# EAGLE board threshold (EAGLE 7.5.0), part 1 of 2
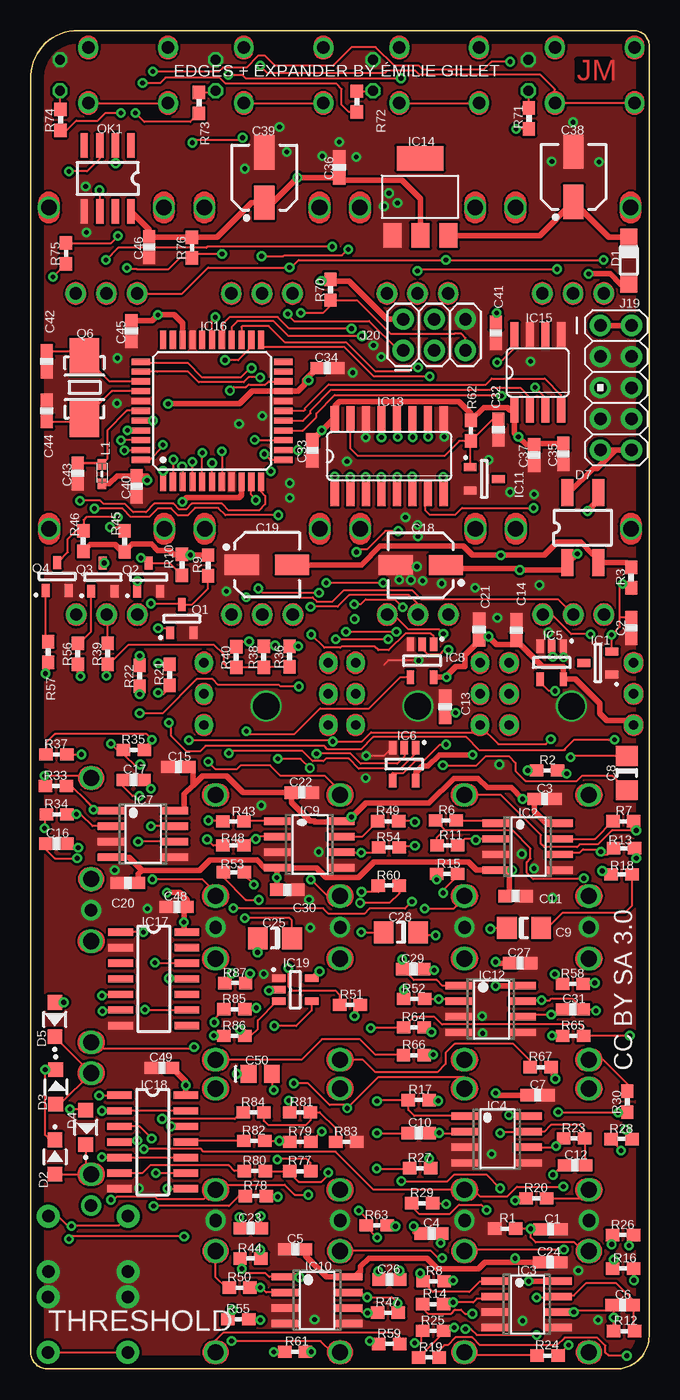
[diagram p0: board, top side]
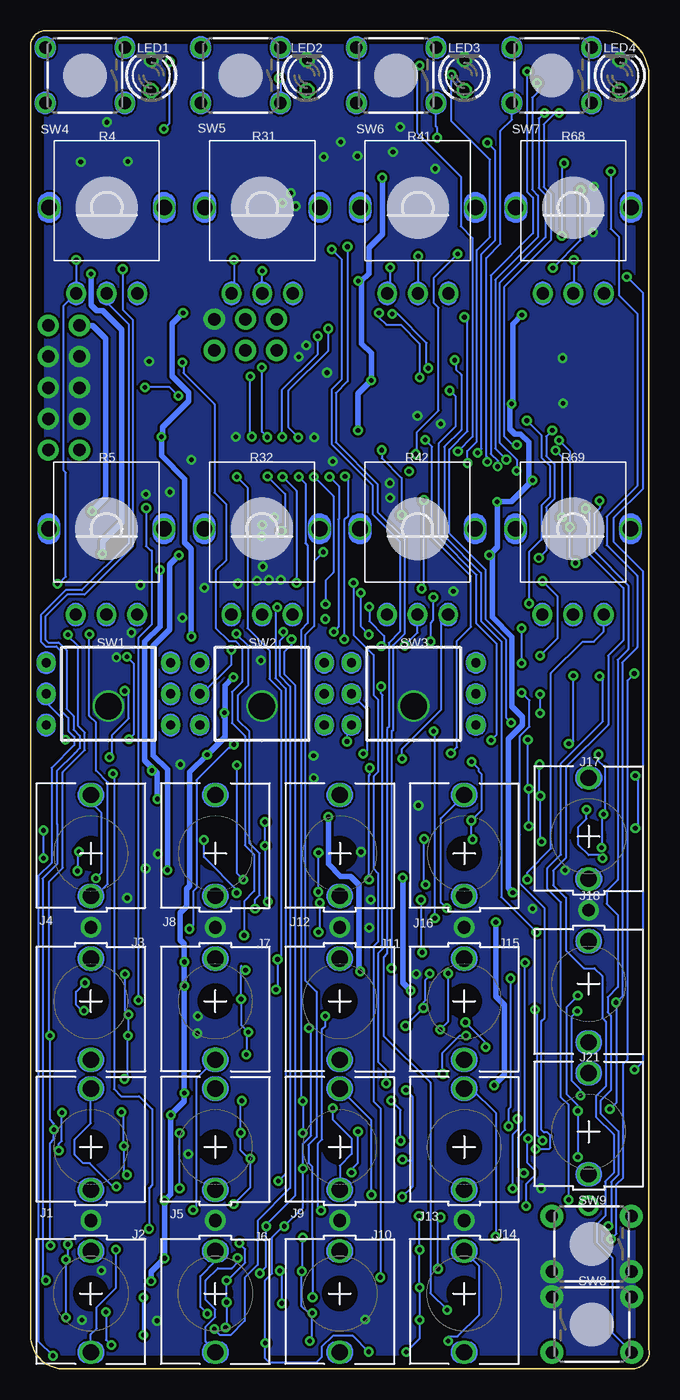
[diagram p1: board, bottom side, seen from below]

Size 50.5 x 109.22 mm. Coordinates in mm from the lower left corner, seen from the top.
Outline: 3.51,109.22 arc82 0.01,105.57 0.01,1.59 arc102 1.45,0 47.96,0 arc86 50.5,2.7 50.5,108.11 arc84 49.23,109.22 3.51,109.22
Copper layers (1*16): Top 0.035mm / dielectric 1.5mm / Bottom 0.035mm
Design rules "default *": minimum track width 10mil, minimum drill 0.61mm, track to track 8mil, track to pad 8mil, pad to pad 8mil, via to via 8mil, smd to smd 8mil, copper to edge 40mil, drill to drill 8mil, minimum pad ring 0mil, minimum via ring 8mil, stop-mask expansion 4mil, vias tented up to drill 24mil, thermal gap 10mil
Net classes: 0 Default: width 0.178 mm, clearance 0.152 mm, clearance 0.152 mm to class 1; 1 power: width 0.432 mm, clearance 0.152 mm, clearance 0.152 mm to class 0

## Footprints (pad centres in the part's own frame; a part is rotated, then mirrored left to right if it is on the bottom)
CAP_0603 = smd 1.1 x 1: 1 -0.85,0; 2 0.85,0
CAP_0603_C2 = smd 1.1 x 1: 1 -0.85,0; 2 0.85,0
CAP_0603_C4 = smd 1.1 x 1: 1 -0.85,0; 2 0.85,0
CAP_1206 = smd 1.6 x 1.8: 1 -1.4,0; 2 1.4,0
CAP_1206_C9 = smd 1.6 x 1.8: 1 -1.4,0; 2 1.4,0
CAP_0603_C11 = smd 1.1 x 1: 1 -0.85,0; 2 0.85,0
CAP_0603_C13 = smd 1.1 x 1: 1 -0.85,0; 2 0.85,0
CAP_0603_C14 = smd 1.1 x 1: 1 -0.85,0; 2 0.85,0
CAP_0603_C17 = smd 1.1 x 1: 1 -0.85,0; 2 0.85,0
CAPAE-5.3x5.3h7 = smd 2.8 x 1.65: 1 -2.05,0; 2 2.05,0
CAPAE-5.3x5.3h7_C19 = smd 2.8 x 1.65: 1 -2.05,0; 2 2.05,0
CAP_0603_C20 = smd 1.1 x 1: 1 -0.85,0; 2 0.85,0
CAP_1206_C28 = smd 1.6 x 1.8: 1 -1.4,0; 2 1.4,0
CAP_0603_C30 = smd 1.1 x 1: 1 -0.85,0; 2 0.85,0
CAP_0603_C32 = smd 1.1 x 1: 1 -0.85,0; 2 0.85,0
CAPAE-5.3x5.3h7_C38 = smd 2.8 x 1.65: 1 -2.05,0; 2 2.05,0
CAP_0603_C41 = smd 1.1 x 1: 1 -0.85,0; 2 0.85,0
CAP_0603_C42 = smd 1.1 x 1: 1 -0.85,0; 2 0.85,0
CAP_0603_C44 = smd 1.1 x 1: 1 -0.85,0; 2 0.85,0
CAP_0603_C46 = smd 1.1 x 1: 1 -0.85,0; 2 0.85,0
CAP_0805 = smd 1.3 x 1.5: 1 -0.95,0; 2 0.95,0
SOD123 = smd 1.4 x 1.4 rotated 0: A 1.9,0; C -1.9,0
SOD-123F = smd 1.2 x 1.2: 1 -1.4,0; 2 1.4,0
SOD-123F_D3 = smd 1.2 x 1.2: 1 -1.4,0; 2 1.4,0
SOD-123F_D4 = smd 1.2 x 1.2: 1 -1.4,0; 2 1.4,0
SOD-123F_D5 = smd 1.2 x 1.2: 1 -1.4,0; 2 1.4,0
SOP-4/6.5x2.54 = smd 2.2 x 1: 1 -2.855,1.27; 2 -2.855,-1.27; 3 2.855,-1.27; 4 2.855,1.27
SOT23 = smd 1.05 x 0.65: 1 -1.15,0.95; 2 -1.15,-0.95; 3 1.15,0
SO08 = smd 0.6 x 2.2 rotated 0: 1 -1.905,-2.6; 2 -0.635,-2.6; 3 0.635,-2.6; 4 1.905,-2.6; 5 1.905,2.6; 6 0.635,2.6; 7 -0.635,2.6; 8 -1.905,2.6
SOT23-5 = smd 1.1 x 0.6: 1 -1.35,0.95; 2 -1.35,0; 3 -1.35,-0.95; 4 1.35,-0.95; 5 1.35,0.95
SOT23-5_IC8 = smd 1.1 x 0.6: 1 -1.35,0.95; 2 -1.35,0; 3 -1.35,-0.95; 4 1.35,-0.95; 5 1.35,0.95
SOT23_IC11 = smd 1.05 x 0.65: 1 -1.15,0.95; 2 -1.15,-0.95; 3 1.15,0
SO16 = smd 0.66 x 2.032 rotated 0: 1 -4.445,-3.073; 2 -3.175,-3.073; 3 -1.905,-3.073; 4 -0.635,-3.073; 5 0.635,-3.073; 6 1.905,-3.073; 7 3.175,-3.073; 8 4.445,-3.073; 9 4.445,3.073; 10 3.175,3.073; 11 1.905,3.073; 12 0.635,3.073; 13 -0.635,3.073; 14 -1.905,3.073; 15 -3.175,3.073; 16 -4.445,3.073
SOT223 = smd 1.499 x 2.007 rotated 0: 1 -2.261,-3.15; 2 0.025,-3.15; 3 2.311,-3.15 | smd 3.81 x 2.007 rotated 0: 4 0,3.15
SO08_IC15 = smd 0.66 x 2.032 rotated 0: 1 -1.905,-3.073; 2 -0.635,-3.073; 3 0.635,-3.073; 4 1.905,-3.073; 5 1.905,3.073; 6 0.635,3.073; 7 -0.635,3.073; 8 -1.905,3.073
TQFP44 = smd 1.5 x 0.5 rotated 0: 1 -5.8,4; 2 -5.8,3.2; 3 -5.8,2.4; 4 -5.8,1.6; 5 -5.8,0.8; 6 -5.8,0; 7 -5.8,-0.8; 8 -5.8,-1.6; 9 -5.8,-2.4; 10 -5.8,-3.2; 11 -5.8,-4; 23 5.8,-4; 24 5.8,-3.2; 25 5.8,-2.4; 26 5.8,-1.6; 27 5.8,-0.8; 28 5.8,0; 29 5.8,0.8; 30 5.8,1.6; 31 5.8,2.4; 32 5.8,3.2; 33 5.8,4 | smd 0.5 x 1.5: 12 -4,-5.8; 13 -3.2,-5.8; 14 -2.4,-5.8; 15 -1.6,-5.8; 16 -0.8,-5.8; 17 0,-5.8; 18 0.8,-5.8; 19 1.6,-5.8; 20 2.4,-5.8; 21 3.2,-5.8; 22 4,-5.8; 34 4,5.8; 35 3.2,5.8; 36 2.4,5.8; 37 1.6,5.8; 38 0.8,5.8; 39 0,5.8; 40 -0.8,5.8; 41 -1.6,5.8; 42 -2.4,5.8; 43 -3.2,5.8; 44 -4,5.8
SOIC-14/150mil = smd 2 x 0.6: 1 -2.7,3.81; 2 -2.7,2.54; 3 -2.7,1.27; 4 -2.7,0; 5 -2.7,-1.27; 6 -2.7,-2.54; 7 -2.7,-3.81; 8 2.7,-3.81; 9 2.7,-2.54; 10 2.7,-1.27; 11 2.7,0; 12 2.7,1.27; 13 2.7,2.54; 14 2.7,3.81
SOT23-5_IC19 = smd 1.1 x 0.6: 1 -1.351,0.95; 2 -1.351,0; 3 -1.351,-0.95; 4 1.349,-0.95; 5 1.349,0.95
Thonkiconn_Jack = drill 1.321 pad 1.905: 1 0,3.48; 2 0,-4.775 | drill 1.016 pad 1.651: 3 0,6.02
Thonkiconn = drill 1.321 pad 1.905: 1 0,3.48; 2 0,-4.775 | drill 1.016 pad 1.651: 3 0,6.02
Thonkiconn_J3 = drill 1.321 pad 1.905: 1 0,3.48; 2 0,-4.775 | drill 1.016 pad 1.651: 3 0,6.02
Thonkiconn_J4 = drill 1.321 pad 1.905: 1 0,3.48; 2 0,-4.775 | drill 1.016 pad 1.651: 3 0,6.02
Thonkiconn_Jack_J5 = drill 1.321 pad 1.905: 1 0,3.48; 2 0,-4.775 | drill 1.016 pad 1.651: 3 0,6.02
Thonkiconn_J10 = drill 1.321 pad 1.905: 1 0,3.48; 2 0,-4.775 | drill 1.016 pad 1.651: 3 0,6.02
Thonkiconn_J17 = drill 1.321 pad 1.905: 1 0,3.48; 2 0,-4.775 | drill 1.016 pad 1.651: 3 0,6.02
Thonkiconn_Jack_J18 = drill 1.321 pad 1.905: 1 0,3.48; 2 0,-4.775 | drill 1.016 pad 1.651: 3 0,6.02
AVR_ICSP = drill 1.016 pad 1.727: 1 -1.27,5.08; 2 1.27,5.08; 3 -1.27,2.54; 4 1.27,2.54; 5 -1.27,0; 6 1.27,0; 7 -1.27,-2.54; 8 1.27,-2.54; 9 -1.27,-5.08; 10 1.27,-5.08
2X3 = drill 1.016 pad 1.727: 1 0,0; 2 0,2.54; 3 2.54,0; 4 2.54,2.54; 5 5.08,0; 6 5.08,2.54
Thonkiconn_Jack_J21 = drill 1.321 pad 1.905: 1 0,3.48; 2 0,-4.775 | drill 1.016 pad 1.651: 3 0,6.02
0603 = smd 0.85 x 0.7 rotated 0: 1 -0.9,0; 2 0.7,0
LED3MM = drill 0.813 pad 1.22 octagon: A -1.27,0; K 1.27,0
SOIC-8/150mil = smd 2 x 0.6: 1 -2.7,1.905; 2 -2.7,0.635; 3 -2.7,-0.635; 4 -2.7,-1.905; 5 2.7,-1.905; 6 2.7,-0.635; 7 2.7,0.635; 8 2.7,1.905
SOT23_Q1 = smd 1.05 x 0.65: 1 -1.15,0.95; 2 -1.15,-0.95; 3 1.15,0
SOT23_Q2 = smd 1.05 x 0.65: 1 -1.15,0.95; 2 -1.15,-0.95; 3 1.15,0
TSC_7A_crystal = smd 3 x 2.4: 1 2.536,0; 2 -2.535,0
RES_0603 = smd 1.1 x 1: 1 -0.85,0; 2 0.85,0
RES_0603_R2 = smd 1.1 x 1: 1 -0.85,0; 2 0.85,0
RES_0603_R3 = smd 1.1 x 1: 1 -0.85,0; 2 0.85,0
ALPS_POT_VERTICAL_PS = drill 1 pad 1.611: P$1 -2.5,7; P$2 0,7; P$3 2.5,7 | drill 1.27 pad 1.778: P$4 -4.7,0; P$5 4.7,0
RES_0603_R7 = smd 1.1 x 1: 1 -0.85,0; 2 0.85,0
RES_0603_R10 = smd 1.1 x 1: 1 -0.85,0; 2 0.85,0
RES_0603_R13 = smd 1.1 x 1: 1 -0.85,0; 2 0.85,0
RES_0603_R43 = smd 1.1 x 1: 1 -0.85,0; 2 0.85,0
RES_0603_R45 = smd 1.1 x 1: 1 -0.85,0; 2 0.85,0
RES_0603_R57 = smd 1.1 x 1: 1 -0.85,0; 2 0.85,0
RES_0603_R62 = smd 1.1 x 1: 1 -0.85,0; 2 0.85,0
RES_0603_R72 = smd 1.1 x 1: 1 -0.85,0; 2 0.85,0
RES_0603_R73 = smd 1.1 x 1: 1 -0.85,0; 2 0.85,0
RES_0603_R75 = smd 1.1 x 1: 1 -0.85,0; 2 0.85,0
RES_0603_R78 = smd 1.1 x 1: 1 -0.85,0; 2 0.85,0
pvb6i = drill 0.762 pad 1.524: 1' -2.54,5.08; 2' 2.54,5.08; 4 -2.54,-5.08; 5C 0,-5.08; 6 2.54,-5.08; C' 0,5.08 | drill 2.159 pad 2.54: 3 0.991,0
pvb6i_SW2 = drill 0.762 pad 1.524: 1' -2.54,5.08; 2' 2.54,5.08; 4 -2.54,-5.08; 5C 0,-5.08; 6 2.54,-5.08; C' 0,5.08 | drill 2.159 pad 2.54: 3 0.991,0
TACTILE-PTH = drill 1.016 pad 1.626: 1 -3.251,2.261; 2 3.251,2.261; 3 -3.251,-2.261; 4 3.251,-2.261
TACTILE-PTH_SW6 = drill 1.016 pad 1.626: 1 -3.251,2.261; 2 3.251,2.261; 3 -3.251,-2.261; 4 3.251,-2.261
TACTILE-PTH_SW8 = drill 1.016 pad 1.88: 1 -3.251,2.261; 2 3.251,2.261; 3 -3.251,-2.261; 4 3.251,-2.261
TACTILE-PTH_SW9 = drill 1.016 pad 1.88: 1 -3.251,2.261; 2 3.251,2.261; 3 -3.251,-2.261; 4 3.251,-2.261

## Placement (x,y rotation side)
C1  470n  [CAP_0603]  42.44,11.39 0 top
C2  470n  [CAP_0603_C2]  49.04,60.47 270 top
C3  100n  [CAP_0603]  41.98,46.51 0 top
C4  100p  [CAP_0603_C4]  32.73,11.05 180 top
C5  100n  [CAP_0603_C4]  21.59,9.76 180 top
C6  100p  [CAP_0603]  48.34,5.21 0 top
C7  100n  [CAP_0603]  41.4,22.34 0 top
C8  10u  [CAP_1206]  48.67,48.63 270 top
C9  10u  [CAP_1206_C9]  40.29,36 0 top
C10  100p  [CAP_0603_C4]  31.69,19.24 180 top
C11  100n  [CAP_0603_C11]  39.61,38.59 180 top
C12  100p  [CAP_0603]  44.44,16.6 0 top
C13  100n  [CAP_0603_C13]  33.85,54.03 90 top
C14  100n  [CAP_0603_C14]  39.65,60.3 90 top
C15  100n  [CAP_0603_C2]  12.07,49.12 180 top
C16  18p  [CAP_0603_C4]  2.1,42.86 180 top
C17  18p  [CAP_0603_C17]  8.41,48.07 0 top
C18  47u  [CAPAE-5.3x5.3h7]  31.86,65.59 180 top
C19  47u  [CAPAE-5.3x5.3h7_C19]  19.29,65.62 0 top
C20  100n  [CAP_0603_C20]  7.94,39.65 0 top
C21  100n  [CAP_0603_C14]  36.62,60.35 90 top
C22  100n  [CAP_0603]  22.14,47.03 0 top
C23  100p  [CAP_0603_C4]  17.98,11.47 180 top
C24  100n  [CAP_0603_C17]  42.4,8.7 0 top
C25  10u  [CAP_1206]  19.94,35.14 180 top
C26  100p  [CAP_0603]  29.3,7.28 0 top
C27  100n  [CAP_0603]  39.97,33.11 0 top
C28  10u  [CAP_1206_C28]  30.24,35.62 180 top
C29  100p  [CAP_0603_C4]  31.25,32.62 180 top
C30  100n  [CAP_0603_C30]  20.96,39.1 180 top
C31  100p  [CAP_0603]  44.28,29.35 0 top
C32  470n  [CAP_0603_C32]  38.2,76.66 270 top
C33  1u  [CAP_0603_C2]  23,74.97 270 top
C34  100n  [CAP_0603]  24.23,81.68 0 top
C35  1u  [CAP_0603_C2]  43.49,74.67 270 top
C36  100n  [CAP_0603_C17]  25.21,98.07 90 top
C37  100n  [CAP_0603_C2]  41.1,74.57 270 top
C38  47u  [CAPAE-5.3x5.3h7_C38]  44.32,97.29 90 top
C39  47u  [CAPAE-5.3x5.3h7_C38]  19.08,97.23 90 top
C40  100n  [CAP_0603_C2]  8.66,72.03 270 top
C41  100n  [CAP_0603_C41]  37.99,84.56 270 top
C42  18p  [CAP_0603_C42]  1.31,82.22 90 top
C43  100n  [CAP_0603_C4]  3.84,73.07 270 top
C44  18p  [CAP_0603_C44]  1.32,78.18 270 top
C45  100n  [CAP_0603_C4]  8.23,84.69 270 top
C46  100n  [CAP_0603_C46]  9.67,91.55 270 top
C48  100n  [CAP_0603_C46]  11.92,37.71 180 top
C49  100n  [CAP_0603_C46]  10.71,24.57 180 top
C50  1u  [CAP_0805]  18.74,24.07 0 top
D1  1N5819HW  [SOD123]  48.85,90.44 270 top
D2  1N4148  [SOD-123F]  1.98,17.3 270 top
D3  1N4148  [SOD-123F_D3]  2.05,23.01 270 top
D4  1N4148  [SOD-123F_D4]  4.5,19.71 90 top
D5  1N4148  [SOD-123F_D5]  1.98,28.52 90 top
D7  MB1S  [SOP-4/6.5x2.54]  45.08,68.65 90 top
IC1  LM4040 10V  [SOT23]  46.31,57.61 180 top
IC2  TL072D  [SO08]  40.59,42.62 270 top
IC3  MCP6002  [SO08]  40.49,5.28 270 top
IC4  MCP6002  [SO08]  38.04,18.72 270 top
IC5  74AHC1G125GV  [SOT23-5]  42.54,57.64 270 top
IC6  74AHC1G86DBV  [SOT23-5]  30.5,49.35 270 top
IC7  TL072D  [SO08]  9.18,43.66 270 top
IC8  74AHC1G86DBV  [SOT23-5_IC8]  31.96,57.8 270 top
IC9  TL072D  [SO08]  22.75,42.8 270 top
IC10  MCP6002  [SO08]  23.38,5.61 270 top
IC11  LM4040B25  [SOT23_IC11]  37.04,72.63 0 top
IC12  MCP6002  [SO08]  37.56,29.37 270 top
IC13  MCP3208  [SO16]  29.28,74.49 0 top
IC14  LM1117-3.3  [SOT223]  31.8,95.65 0 top
IC15  MCP4822  [SO08_IC15]  41.4,81.32 0 top
IC16  ATXMEGA32A4U-AU  [TQFP44]  14.82,78.19 90 top
IC17  M74HC4024M1R  [SOIC-14/150mil]  10.05,31.83 0 top
IC18  74LS86D  [SOIC-14/150mil]  9.97,18.52 0 top
IC19  LM321MF  [SOT23-5_IC19]  21.6,30.95 0 top
J1  THONKICONN  [Thonkiconn_Jack]  45.58,18.1 180 bottom
J2  PJ301_THONKICONN6  [Thonkiconn]  45.58,6.13 0 bottom
J3  PJ301_THONKICONN6  [Thonkiconn_J3]  45.58,30 0 bottom
J4  PJ301_THONKICONN6  [Thonkiconn_J4]  45.58,42.07 180 bottom
J5  THONKICONN  [Thonkiconn_Jack_J5]  35.42,18.1 180 bottom
J6  PJ301_THONKICONN6  [Thonkiconn]  35.42,6.13 0 bottom
J7  PJ301_THONKICONN6  [Thonkiconn_J3]  35.42,30 0 bottom
J8  PJ301_THONKICONN6  [Thonkiconn_J4]  35.42,42.07 180 bottom
J9  THONKICONN  [Thonkiconn_Jack]  25.26,18.1 180 bottom
J10  PJ301_THONKICONN6  [Thonkiconn_J10]  25.26,6.13 0 bottom
J11  PJ301_THONKICONN6  [Thonkiconn_J3]  25.26,30 0 bottom
J12  PJ301_THONKICONN6  [Thonkiconn_J4]  25.26,42.07 180 bottom
J13  THONKICONN  [Thonkiconn_Jack_J5]  15.1,18.1 180 bottom
J14  PJ301_THONKICONN6  [Thonkiconn_J10]  15.1,6.13 0 bottom
J15  PJ301_THONKICONN6  [Thonkiconn_J3]  15.1,30 0 bottom
J16  PJ301_THONKICONN6  [Thonkiconn_J4]  15.1,42.07 180 bottom
J17  PJ301_THONKICONN6  [Thonkiconn_J17]  4.94,43.45 180 bottom
J18  THONKICONN  [Thonkiconn_Jack_J18]  4.94,31.42 0 bottom
J19  M05X2PTH  [AVR_ICSP]  47.79,80.08 0 top
J20  AVR_SPI_PRG_6PTH  [2X3]  30.42,83.13 0 top
J21  STEREO  [Thonkiconn_Jack_J21]  4.94,19.35 180 bottom
L1  WE-CBF_0603  [0603]  5.83,73.14 90 top
LED1  LED3MM  [LED3MM]  40.65,105.57 90 bottom
LED2  LED3MM  [LED3MM]  27.95,105.57 90 bottom
LED3  LED3MM  [LED3MM]  15.1,105.57 90 bottom
LED4  LED3MM  [LED3MM]  2.4,105.57 90 bottom
OK1  6N137  [SOIC-8/150mil]  6.28,97.15 270 top
Q1  MMBT3904  [SOT23_Q1]  12.35,61.22 90 top
Q2  MMBT3904  [SOT23_Q2]  9.64,64.61 90 top
Q3  MMBT3904  [SOT23_Q2]  5.89,64.62 90 top
Q4  MMBT3904  [SOT23_Q2]  2.17,64.67 90 top
Q6  8MHz  [TSC_7A_crystal]  4.4,80.1 270 top
R1  2k  [RES_0603]  38.73,11.45 0 top
R2  10k  [RES_0603_R2]  42.17,48.83 180 top
R3  300  [RES_0603_R3]  49.03,64.59 270 top
R4  10kB  [ALPS_POT_VERTICAL_PS]  44.29,94.77 180 bottom
R5  10kB  [ALPS_POT_VERTICAL_PS]  44.31,68.56 180 bottom
R6  1k  [RES_0603_R3]  33.9,44.75 180 top
R7  1k  [RES_0603_R7]  48.39,44.7 0 top
R8  24.9k  [RES_0603_R3]  32.9,7.15 180 top
R9  10k  [RES_0603]  14.49,65.57 90 top
R10  10k  [RES_0603_R10]  12.35,65.61 90 top
R11  33k  [RES_0603_R3]  34.03,42.71 180 top
R12  24.9k  [RES_0603_R7]  48.46,3.09 0 top
R13  33k  [RES_0603_R13]  48.44,42.49 0 top
R14  100k  [RES_0603_R7]  32.87,5.29 0 top
R15  10k  [RES_0603_R7]  34,40.39 0 top
R16  200k  [RES_0603_R3]  48.37,8.19 180 top
R17  24.9k  [RES_0603_R3]  31.69,21.94 180 top
R18  10k  [RES_0603_R3]  48.26,40.35 180 top
R19  200k  [RES_0603_R2]  32.52,0.93 180 top
R20  1k  [RES_0603]  41.3,13.92 0 top
R21  100k  [RES_0603_R3]  11.36,56.64 270 top
R22  100k  [RES_0603_R3]  8.9,56.57 270 top
R23  24.9k  [RES_0603_R7]  44.37,18.82 0 top
R24  100k  [RES_0603]  42.2,1.1 0 top
R25  200k  [RES_0603_R7]  32.87,3.11 0 top
R26  200k  [RES_0603_R2]  48.36,10.92 180 top
R27  200k  [RES_0603_R7]  31.8,16.38 0 top
R28  200k  [RES_0603_R3]  48.25,18.75 180 top
R29  100k  [RES_0603_R7]  31.96,13.52 0 top
R30  100k  [RES_0603_R3]  48.72,21.8 270 top
R31  10kB  [ALPS_POT_VERTICAL_PS]  31.59,94.77 180 bottom
R32  10kB  [ALPS_POT_VERTICAL_PS]  31.61,68.56 180 bottom
R33  1k  [RES_0603_R3]  2.06,47.57 180 top
R34  100k  [RES_0603_R3]  2.13,45.25 180 top
R35  33k  [RES_0603]  8.42,50.52 0 top
R36  100k  [RES_0603_R3]  21.15,58.14 270 top
R37  100k  [RES_0603_R7]  2.11,50.14 0 top
R38  100k  [RES_0603_R3]  19.04,58.11 270 top
R39  39k  [RES_0603_R3]  6.29,58.37 270 top
R40  100k  [RES_0603_R3]  16.8,58.1 270 top
R41  10kB  [ALPS_POT_VERTICAL_PS]  18.89,94.77 180 bottom
R42  10kB  [ALPS_POT_VERTICAL_PS]  18.91,68.56 180 bottom
R43  1k  [RES_0603_R43]  16.55,44.68 180 top
R44  24.9k  [RES_0603_R3]  17.95,9 180 top
R45  10k  [RES_0603_R45]  7.67,67.53 270 top
R46  10k  [RES_0603_R45]  4.31,67.56 270 top
R47  24.9k  [RES_0603_R7]  29.18,4.59 0 top
R48  33k  [RES_0603_R3]  16.55,42.71 180 top
R49  1k  [RES_0603_R7]  29.2,44.7 0 top
R50  100k  [RES_0603_R7]  17.07,6.64 0 top
R51  200k  [RES_0603]  26.07,29.7 0 top
R52  24.9k  [RES_0603_R3]  31.31,30.19 180 top
R53  10k  [RES_0603_R7]  16.59,40.54 0 top
R54  82k  [RES_0603_R7]  29.26,42.56 0 top
R55  200k  [RES_0603_R7]  16.96,4.05 0 top
R56  100k  [RES_0603_R3]  3.86,58.36 270 top
R57  100k  [RES_0603_R57]  1.43,58.5 270 top
R58  24.9k  [RES_0603_R7]  44.27,31.41 0 top
R59  100k  [RES_0603_R3]  29.29,2.03 180 top
R60  10k  [RES_0603_R3]  29.24,39.43 180 top
R61  200k  [RES_0603_R2]  21.59,1.4 180 top
R62  1k  [RES_0603_R62]  35.94,76.57 270 top
R63  200k  [RES_0603_R2]  28.26,11.71 180 top
R64  200k  [RES_0603_R7]  31.29,27.88 0 top
R65  200k  [RES_0603_R3]  44.29,27.19 180 top
R66  100k  [RES_0603_R7]  31.29,25.61 0 top
R67  100k  [RES_0603]  41.65,24.63 0 top
R68  10kB  [ALPS_POT_VERTICAL_PS]  6.19,94.77 180 bottom
R69  10kB  [ALPS_POT_VERTICAL_PS]  6.21,68.56 180 bottom
R70  39k  [RES_0603]  24.49,88.07 90 top
R71  100  [RES_0603]  40.69,102.05 90 top
R72  100  [RES_0603_R72]  26.62,103.43 90 top
R73  100  [RES_0603_R73]  13.73,103.33 90 top
R74  100  [RES_0603]  2.43,101.94 90 top
R75  220  [RES_0603_R75]  2.88,91.04 90 top
R76  4.7k  [RES_0603_R75]  13.16,91.5 90 top
R77  10k  [RES_0603_R75]  22.01,16.14 0 top
R78  20k  [RES_0603_R78]  18.38,14.11 180 top
R79  10k  [RES_0603_R75]  22.02,18.54 0 top
R80  20k  [RES_0603_R78]  18.3,16.15 180 top
R81  10k  [RES_0603_R78]  21.99,20.94 180 top
R82  20k  [RES_0603_R78]  18.25,18.62 180 top
R83  20k  [RES_0603_R78]  25.77,18.53 180 top
R84  20k  [RES_0603_R78]  18.2,20.93 180 top
R85  1k  [RES_0603_R75]  16.64,29.36 0 top
R86  10k  [RES_0603_R2]  16.64,27.17 180 top
R87  30k  [RES_0603_R2]  16.7,31.47 180 top
SW1  FX_HI  [pvb6i]  44.15,55.09 270 bottom
SW2  FX_HI  [pvb6i_SW2]  31.61,55.09 270 bottom
SW3  FX_HI  [pvb6i_SW2]  19.23,55.09 270 bottom
SW4  TAC_SWITCHPTH  [TACTILE-PTH]  46.06,105.57 180 bottom
SW5  TAC_SWITCHPTH  [TACTILE-PTH]  33.36,105.57 180 bottom
SW6  TAC_SWITCHPTH  [TACTILE-PTH_SW6]  20.66,105.57 180 bottom
SW7  TAC_SWITCHPTH  [TACTILE-PTH_SW6]  7.96,105.57 180 bottom
SW8  TAC_SWITCHPTH  [TACTILE-PTH_SW8]  4.68,3.61 0 bottom
SW9  TAC_SWITCHPTH  [TACTILE-PTH_SW9]  4.7,10.2 180 bottom

## Library data of the parts
C1-C18 C20-C46 C48-C50 D1-D5 D7 IC1-IC4 IC6-IC16 IC18 J1-J21 L1 LED1-LED4 OK1 Q1-Q4 R1-R87 SW1-SW9 = common
C19 = common; MANUFACTURER: PANA
IC5 = common; DATASHEET: http://datasheets.diptrace.com/philips-nxp/74AHC_AHCT1G125.pdf; MANUFACTURER: NXP-Philips
IC17 = common; DATASHEET: http://datasheets.diptrace.com/st_micro/CD00000314.pdf; MANUFACTURER: ST Microelectronics
IC19 = common; DATASHEET: http://www.st.com/internet/com/TECHNICAL_RESOURCES/TECHNICAL_LITERATURE/DATASHEET/CD00000489.pdf
Q6 = common; DATASHEET: http://datasheets.diptrace.com/crystals/12SMX.pdf

## Nets
+3V3 [power]: C5.1 C7.1 C13.1 C14.1 C21.1 C24.1 C27.1 C33.1 C34.1 C35.1 C36.1 C37.1 C39.1 C40.1 C41.1 C45.1 C46.1 C48.1 C49.1 IC3.8 IC4.8 IC5.5 IC6.5 IC8.5 IC10.8 IC12.8 IC13.16 IC14.2 IC15.1 IC16.9 IC16.19 IC16.31 IC17.14 IC18.14 J20.2 L1.1 OK1.8 R9.2 R10.2 R20.1 R45.2 R46.2 R62.1 R70.2 R76.2 SW1.6
ADC_MISO: IC13.12 IC16.26
ADC_MOSI: IC13.11 IC16.25
ADC_SCK: IC13.13 IC16.27
ADC_SS: IC13.10 IC16.23
AREF: C32.1 IC11.1 IC13.15 R62.2
AREF_-10: C2.1 IC1.2 R3.2 R4.P$3 R25.1 R26.1 R27.1 R28.1 R31.P$3 R41.P$3 R61.1 R63.1 R64.1 R65.1 R68.P$3
CH1: C4.2 IC3.1 IC13.1 R8.2
CH2: C6.2 IC3.7 IC13.2 R12.2
CH3: C23.2 IC10.1 IC13.5 R44.2
CH4: C26.2 IC10.7 IC13.6 R47.2
CH5: C12.2 IC4.7 IC13.3 R23.2
CH6: C10.2 IC4.1 IC13.4 R17.2
CH7: C31.2 IC12.7 IC13.7 R58.2
CH8: C29.2 IC12.1 IC13.8 R52.2
CHANNEL1: C8.1 IC5.4
CHANNEL1_BUFFERED: J4.2 R6.2 R11.2
CHANNEL1_RETURN: R5.P$2 R40.1
CHANNEL2: C9.1 IC6.4
CHANNEL2_BUFFERED: J8.2 R7.2 R13.2
CHANNEL2_RETURN: R32.P$2 R36.1
CHANNEL3: C25.1 IC8.4
CHANNEL3_BUFFERED: J12.2 R43.2 R48.2
CHANNEL3_RETURN: R38.1 R42.P$2
CHANNEL4: C28.1 IC15.8
CHANNEL4_BUFFERED: J16.2 R49.2 R54.2
CHANNEL4_RETURN: R39.1 R69.P$2
COARSE1: R4.P$2 R19.1
COARSE2: R16.1 R31.P$2
COARSE3: R41.P$2 R55.1
COARSE4: R51.1 R68.P$2
CV1: J2.2 J6.1 R14.1
CV2: J6.2 J10.1 R24.1
CV3: J10.2 J14.1 R50.1
CV4: J14.2 R59.1
DAC_MOSI: IC15.4 IC16.17
DAC_SCK: IC15.3 IC16.15
DAC_SS: IC15.2 IC16.16
FM1: J3.2 R30.1
FM2: J7.2 R29.1
FM3: J11.2 R67.1
FM4: J15.2 R66.1
GATE1: IC16.40 Q1.3 R9.1
GATE1_IN: J1.2 J5.1 R21.2
GATE1_LED: LED4.A R74.2
GATE2: IC16.41 Q2.3 R10.1
GATE2_IN: J5.2 J9.1 R22.2
GATE2_LED: LED3.A R73.2
GATE3: IC16.42 Q3.3 R45.1
GATE3_IN: J9.2 J13.1 R56.2
GATE3_LED: LED2.A R72.2
GATE4: IC16.43 Q4.3 R46.1
GATE4_IN: J13.2 R57.2
GATE4_LED: LED1.A R71.2
GND: C1.2 C2.2 C3.2 C5.2 C7.2 C11.1 C13.2 C14.2 C15.2 C18.2 C19.1 C20.1 C21.2 C22.2 C24.2 C27.2 C30.1 C32.2 C33.2 C34.2 C35.2 C36.2 C37.2 C38.2 C39.2 C40.2 C41.2 C42.1 C43.2 C44.1 C45.2 C46.2 C48.2 C49.2 IC1.1 IC2.3 IC2.5 IC3.3 IC3.4 IC3.5 IC4.3 IC4.4 IC4.5 IC5.1 IC5.3 IC6.3 IC7.3 IC7.5 IC8.3 IC9.3 IC9.5 IC10.3 IC10.4 IC10.5 IC11.2 IC12.3 IC12.4 IC12.5 IC13.9 IC13.14 IC14.1 IC15.5 IC15.7 IC16.8 IC16.18 IC16.30 IC16.38 IC17.2 IC17.7 IC18.7 IC19.1 J1.3 J2.3 J3.3 J4.3 J5.3 J6.3 J7.3 J8.3 J9.3 J10.3 J11.3 J12.3 J13.3 J14.3 J15.3 J16.3 J17.3 J18.3 J19.3 J19.4 J19.5 J19.6 J19.7 J19.8 J20.6 LED1.K LED2.K LED3.K LED4.K OK1.5 Q1.2 Q2.2 Q3.2 Q4.2 R1.1 R4.P$1 R4.P$4 R4.P$5 R5.P$3 R5.P$4 R5.P$5 R31.P$1 R31.P$4 R31.P$5 R32.P$3 R32.P$4 R32.P$5 R41.P$1 R41.P$4 R41.P$5 R42.P$3 R42.P$4 R42.P$5 R68.P$1 R68.P$4 R68.P$5 R69.P$3 R69.P$4 R69.P$5 R83.1 SW1.3 SW1.4 SW2.3 SW2.4 SW3.3 SW3.4 SW4.3 SW4.4 SW5.3 SW5.4 SW6.3 SW6.4 SW7.3 SW7.4 SW8.1 SW8.2 SW9.1 SW9.2
MIDI_IN: IC16.12 OK1.6 R76.1
MIX: J17.2 R33.2 R34.2
N$1: Q1.1 R21.1
N$2: Q2.1 R22.1
N$3: Q3.1 R56.1
N$4: J8.1 R32.P$1
N$5: IC16.44 R74.1
N$6: IC16.1 R73.1
N$7: IC16.2 R72.1
N$8: IC16.3 R71.1
N$9: C23.1 IC10.2 R44.1 R50.2 R55.2 R61.2
N$11: C10.1 IC4.2 R17.1 R27.2 R29.2
N$12: J1.1 R20.2
N$13: C26.1 IC10.6 R47.1 R51.2 R59.2 R63.2
N$15: C31.1 IC12.6 R58.1 R65.2 R67.2
N$18: C29.1 IC12.2 R52.1 R64.2 R66.2
N$19: IC6.1 IC16.14
N$20: C8.2 R15.1
N$21: IC8.2 SW2.5C
N$22: IC2.2 R11.1 R15.2
N$23: IC2.1 R6.1
N$24: IC6.2 SW3.5C
N$25: C9.2 R18.1
N$26: IC2.6 R13.1 R18.2
N$27: IC2.7 R7.1
N$28: C25.2 R53.1
N$29: C12.1 IC4.6 R23.1 R28.2 R30.2
N$30: IC9.2 R48.1 R53.2
N$31: IC9.1 R43.1
N$32: C28.2 R60.1
N$33: IC9.6 R54.1 R60.2
N$34: IC9.7 R49.1
N$35: C17.1 IC7.6 R35.1 R36.2 R38.2 R39.2 R40.2
N$36: C16.1 IC7.2 R34.1 R37.2
N$37: C16.2 IC7.1 R33.1
N$38: C38.1 D1.C IC14.3
N$39: C43.1 IC16.39 L1.2
N$40: J4.1 R5.P$1
N$41: IC8.1 IC16.10
N$42: C17.2 IC7.7 R35.2 R37.1
N$43: J12.1 R42.P$1
N$44: J16.1 R69.P$1
N$45: C6.1 IC3.6 R12.1 R16.2 R24.2 R26.2
N$46: C1.1 J2.1 R1.2 R2.1
N$48: IC5.2 IC16.20 SW2.6 SW3.6
N$49: IC17.5 IC18.2 IC18.5 IC18.10 IC18.13
N$50: C4.1 IC3.2 R8.1 R14.2 R19.2 R25.2
N$51: IC17.11 IC18.12
N$52: IC17.12 IC18.9
N$56: IC17.6 IC18.1
N$58: R81.1 R83.2 R84.1
N$59: R79.1 R81.2 R82.1
N$60: R77.1 R79.2 R80.1
N$61: C50.2 R77.2 R78.1
N$64: J18.2 R85.1
N$82: C44.2 IC16.37 Q6.1
N$83: C42.2 IC16.36 Q6.2
N$40000: Q4.1 R57.1
NES_TRIANGLE_CLK: IC16.24 IC17.1
Net_0: IC19.3 R86.1 R87.2
Net_1: C50.1 R86.2
Net_56: D4.2 D5.2 OK1.3
Net_57: D2.1 D3.1 R75.1
Net_101 [power]: D7.3 J19.1 J19.2
Net_113: D2.2 D4.1 J21.1
Net_131: IC18.6 R80.2
Net_132: IC18.3 R78.2
Net_133: IC18.11 R82.2
Net_134: IC18.8 R84.2
Net_135: IC19.4 R85.2 R87.1
Net_136: D3.2 D5.1 J21.2
Net_137: OK1.2 R75.2
Net_138: IC17.9 IC18.4
Net_139: D7.4 J19.9 J19.10
PDICLK: IC16.35 J20.5 R70.1
PDIDATA: IC16.34 J20.1
SW1: IC16.4 SW7.1 SW7.2
SW2: IC16.5 SW6.1 SW6.2
SW3: IC16.6 SW5.1 SW5.2
SW4: IC16.7 SW4.1 SW4.2
SW_MIDI_LEARN: IC16.11 SW9.3 SW9.4
SW_MIDI_MODE: IC16.13 SW8.3 SW8.4
SYNC_SWITCH: IC16.28 SW1.5C
VCC [power]: C3.1 C15.1 C18.1 C22.1 D1.A D7.1 IC2.8 IC7.8 IC9.8 IC19.5 R2.2
VEE [power]: C11.2 C19.2 C20.2 C30.2 D7.2 IC2.4 IC7.4 IC9.4 IC19.2 R3.1